# EAGLE board servoRGB (EAGLE 7.2.0)
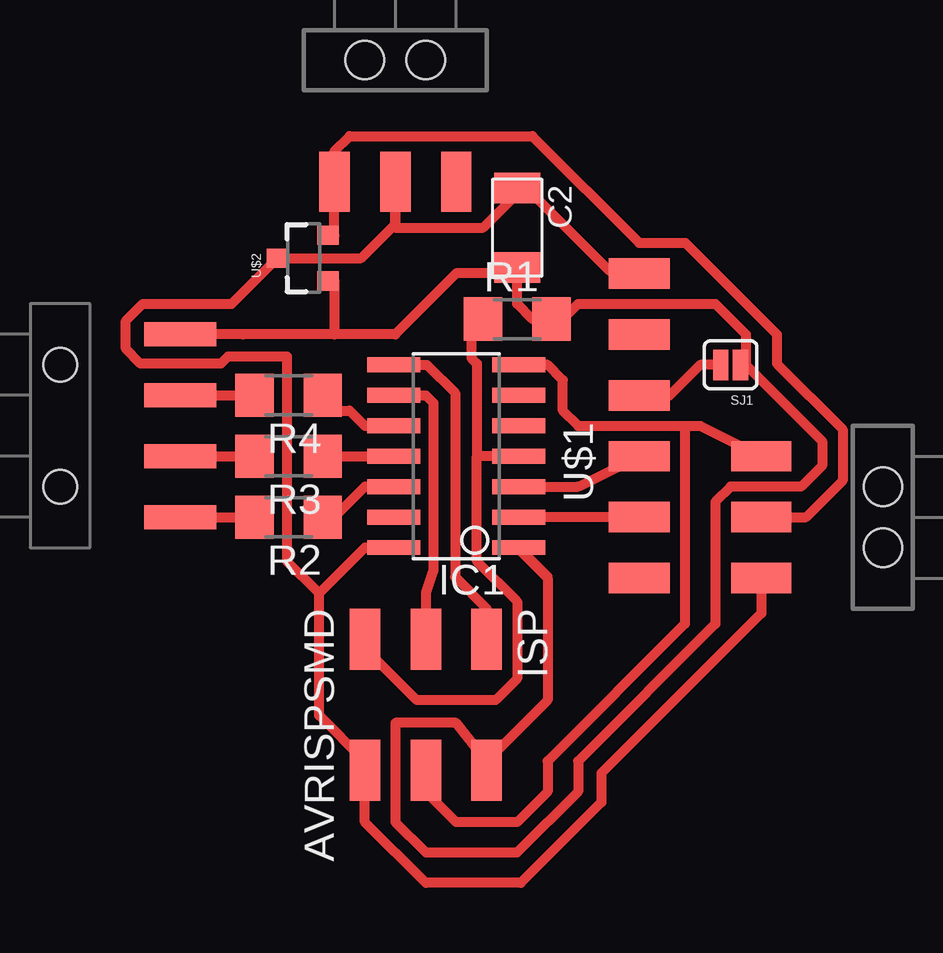
[diagram p0: board, top side]

No outline drawn. Coordinates in mm, seen from the top.
Copper layers (1*16): Top 0.035mm / dielectric 1.5mm / Bottom 0.035mm
Design rules "default": minimum track width 10mil, minimum drill 24mil, track to track 8mil, track to pad 8mil, pad to pad 8mil, via to via 8mil, smd to smd 8mil, copper to edge 40mil, drill to drill 8mil, minimum pad ring 10mil, minimum via ring 8mil, stop-mask expansion 4mil, vias tented up to drill 0mil, thermal gap 10mil

## Footprints (pad centres in the part's own frame; a part is rotated, then mirrored left to right if it is on the bottom)
C1206FAB = smd 1.27 x 1.905: 1 -1.651,0; 2 1.651,0
SOIC14 = smd 0.61 x 2.21: 1 -3.81,-2.603; 2 -2.54,-2.603; 3 -1.27,-2.603; 4 0,-2.603; 5 1.27,-2.603; 6 2.54,-2.603; 7 3.81,-2.603; 8 3.81,2.603; 9 2.54,2.603; 10 1.27,2.603; 11 0,2.603; 12 -1.27,2.603; 13 -2.54,2.603; 14 -3.81,2.603
2X03SMD = smd 2.54 x 1.27: 1 -2.54,2.54; 2 2.92,2.54; 3 -2.54,0; 4 2.92,0; 5 -2.54,-2.54; 6 2.92,-2.54
1X03_SMD_RA_MALE_POST = smd 1.27 x 2.5: 1 -2.54,5.07; 2 0,5.07; 3 2.54,5.07 | hole 1.6: -1.27,0; 1.27,0
1206 = smd 1.6 x 1.803: 1 -1.422,0; 2 1.422,0
1X04-SMD = smd 1 x 3: 1 -3.81,5; 2 -1.27,5; 3 1.27,5; 4 3.81,5 | hole 1.4: -2.54,0; 2.54,0
SJ_2S = smd 0.635 x 1.27: 1 -0.412,0; 2 0.412,0
1X06SMD = smd 2.54 x 1.27: 1 0,6.35; 2 0,3.81; 3 0,1.27; 4 0,-1.27; 5 0,-3.81; 6 0,-6.35
SOT23-3 = smd 0.8 x 0.9: 1 -0.95,-1; 2 0.95,-1; 3 0,1.1

## Placement (x,y rotation side)
C2  10uF  [C1206FAB]  19.05,27.3 270 top
IC1  ATTINY44-SSU  [SOIC14]  16.51,17.78 90 top
ISP  AVRISPSMD  [2X03SMD]  15.24,7.62 270 top
POWER  [1X03_SMD_RA_MALE_POST]  13.97,34.29 180 top
R1  10k  [1206]  19.05,23.5 0 top
R2  4.99  [1206]  9.53,15.24 180 top
R3  4.99  [1206]  9.53,17.78 180 top
R4  100  [1206]  9.53,20.32 180 top
RGB  [1X04-SMD]  0,19.05 270 top
SERVO_0  [1X03_SMD_RA_MALE_POST]  34.29,15.24 90 top
SJ1  SOLDERJUMPERNC  [SJ_2S]  27.94,21.59 180 top
U$1  FTDI-SMD-HEADER  [1X06SMD]  24.13,19.05 0 top
U$2  LM3480IM4  [SOT23-3]  10.16,26.04 90 top

## Library data of the parts
C2 U$1 = fab
IC1 ISP R1-R4 = 01_FAB_RHello
POWER RGB SERVO_0 = SparkFun-Connectors
SJ1 = SparkFun-Retired
U$2 = SparkFun-PowerIC

## Nets
BLUE: IC1.12 R2.1
GND: C2.1 IC1.14 ISP.6 POWER.2 SERVO_0.1 U$1.1 U$2.3
GREEN: IC1.11 R3.1
MISO: IC1.8 ISP.1
N$1: R4.2 RGB.2
N$2: IC1.5
N$3: R3.2 RGB.3
N$4: R2.2 RGB.4
N$6: U$1.2
N$7: SJ1.2 U$1.3
N$10: U$1.6
N$12: IC1.13
RED: IC1.10 R4.1
RESET: IC1.4 ISP.5 R1.1
RX: IC1.2 U$1.5
S0/WHT: IC1.7 ISP.4 SERVO_0.3
SCK: IC1.9 ISP.3
TX: IC1.3 U$1.4
V3.3: C2.2 IC1.1 ISP.2 R1.2 RGB.1 SJ1.1 U$2.1
V5: POWER.3 SERVO_0.2 U$2.2

## Tracks (layer width: path | path; a pad name or v marks a point on that pad's centre or on a via)
BLUE
  Top 0.406: R2.1 11.43,15.24 12.06,15.88 12.7,16.51 IC1.12
GND
  Top 0.406: U$1.1 22.86,25.54 19.44,28.96 C2.1 19.05,28.73 17.63,27.3 13.97,27.3 POWER.2 13.97,27.45 12.55,26.04 U$2.3 7.16,24.13 3.45,24.13 2.74,23.42 2.74,22.25 3.35,21.64 6.71,21.64 7.01,21.95 9.45,21.95 9.45,13.41 10.79,12.06 | 10.79,12.06 12.7,13.97 IC1.14 | 10.79,12.06 10.79,6.99 12.7,5.08 ISP.6 12.7,2.54 15.24,0 19.2,0 22.55,3.35 22.55,4.57 29.22,11.24 SERVO_0.1
GREEN
  Top 0.406: R3.1 IC1.11
MISO
  Top 0.406: IC1.8 15.29,21.59 16.46,20.42 16.46,12.75 17.78,11.43 ISP.1
N$1
  Top 0.406: RGB.2 R4.2
N$3
  Top 0.406: RGB.3 R3.2
N$4
  Top 0.406: RGB.4 R2.2
N$7
  Top 0.406: SJ1.2 26.67,21.59 25.4,20.32 U$1.3
RED
  Top 0.406: R4.1 11.43,20.32 11.43,19.68 12.06,19.68 12.7,19.05 IC1.10
RESET
  Top 0.406: 19.68,17.78 IC1.4 17.37,17.78 | R1.1 17.14,23.5 17.14,21.87 17.37,21.64 17.37,17.78 | ISP.5 12.7,9.79 14.87,7.62 18.15,7.62 19.05,8.52 19.05,11.73 17.37,13.41 17.37,17.78
RX
  Top 0.406: U$1.5 IC1.2
S0/WHT
  Top 0.406: IC1.7 20.32,21.59 20.95,20.95 20.95,19.68 21.59,19.05 26.04,19.05 | 26.04,19.05 26.68,19.05 SERVO_0.3 | ISP.4 15.24,3.81 16.51,2.54 19.05,2.54 20.32,3.81 20.32,5.08 26.04,10.79 26.04,19.05
SCK
  Top 0.406: IC1.9 15.24,20.32 15.56,20 15.56,13.02 15.24,12.06 ISP.3
TX
  Top 0.406: IC1.3 21.59,16.51 U$1.4
V3.3
  Top 0.406: C2.2 19.05,25.4 | 19.05,25.4 19.05,24.13 19.68,23.5 R1.2 20.95,23.5 21.59,24.13 27.3,24.13 28.57,22.86 28.57,21.81 | 7.62,22.86 RGB.1 11.43,22.86 | 19.05,25.4 16.51,25.4 13.97,22.86 11.43,22.86 | U$2.1 11.43,25.09 11.43,22.86 | ISP.2 17.78,5.08 | 20.32,12.7 20.32,12.76 IC1.1 19.11,13.91 20.32,12.7 | 20.32,12.7 20.32,7.62 17.78,5.08 | 17.78,5.08 16.51,6.67 13.97,6.67 13.97,2.54 15.24,1.27 19.05,1.27 21.59,3.81 21.59,5.08 27.3,10.79 27.3,15.88 27.94,16.51 30.89,16.51 31.75,17.38 31.75,18.41 28.57,21.59 | 28.57,21.81 SJ1.1 28.57,21.59 | 28.57,21.81 28.57,21.59
V5
  Top 0.406: U$2.2 11.43,26.98 POWER.3 11.43,30.48 12.06,31.11 19.68,31.11 24.13,26.67 26.06,26.67 26.67,26.06 29.87,22.86 29.87,21.64 32.61,18.9 32.61,16.76 31.09,15.24 SERVO_0.2